# Altium PCB Mega2560ProMini-ServosExtendBoard.PcbDoc
Units mil, origin at the board's own origin, x right, y up, seen from the top; angles counter-clockwise.
Board outline 1720.03 x 2700.03 mil, 2 copper layers (Top Layer, Bottom Layer); 25 components, 20 nets, 151 pads, 0 vias.
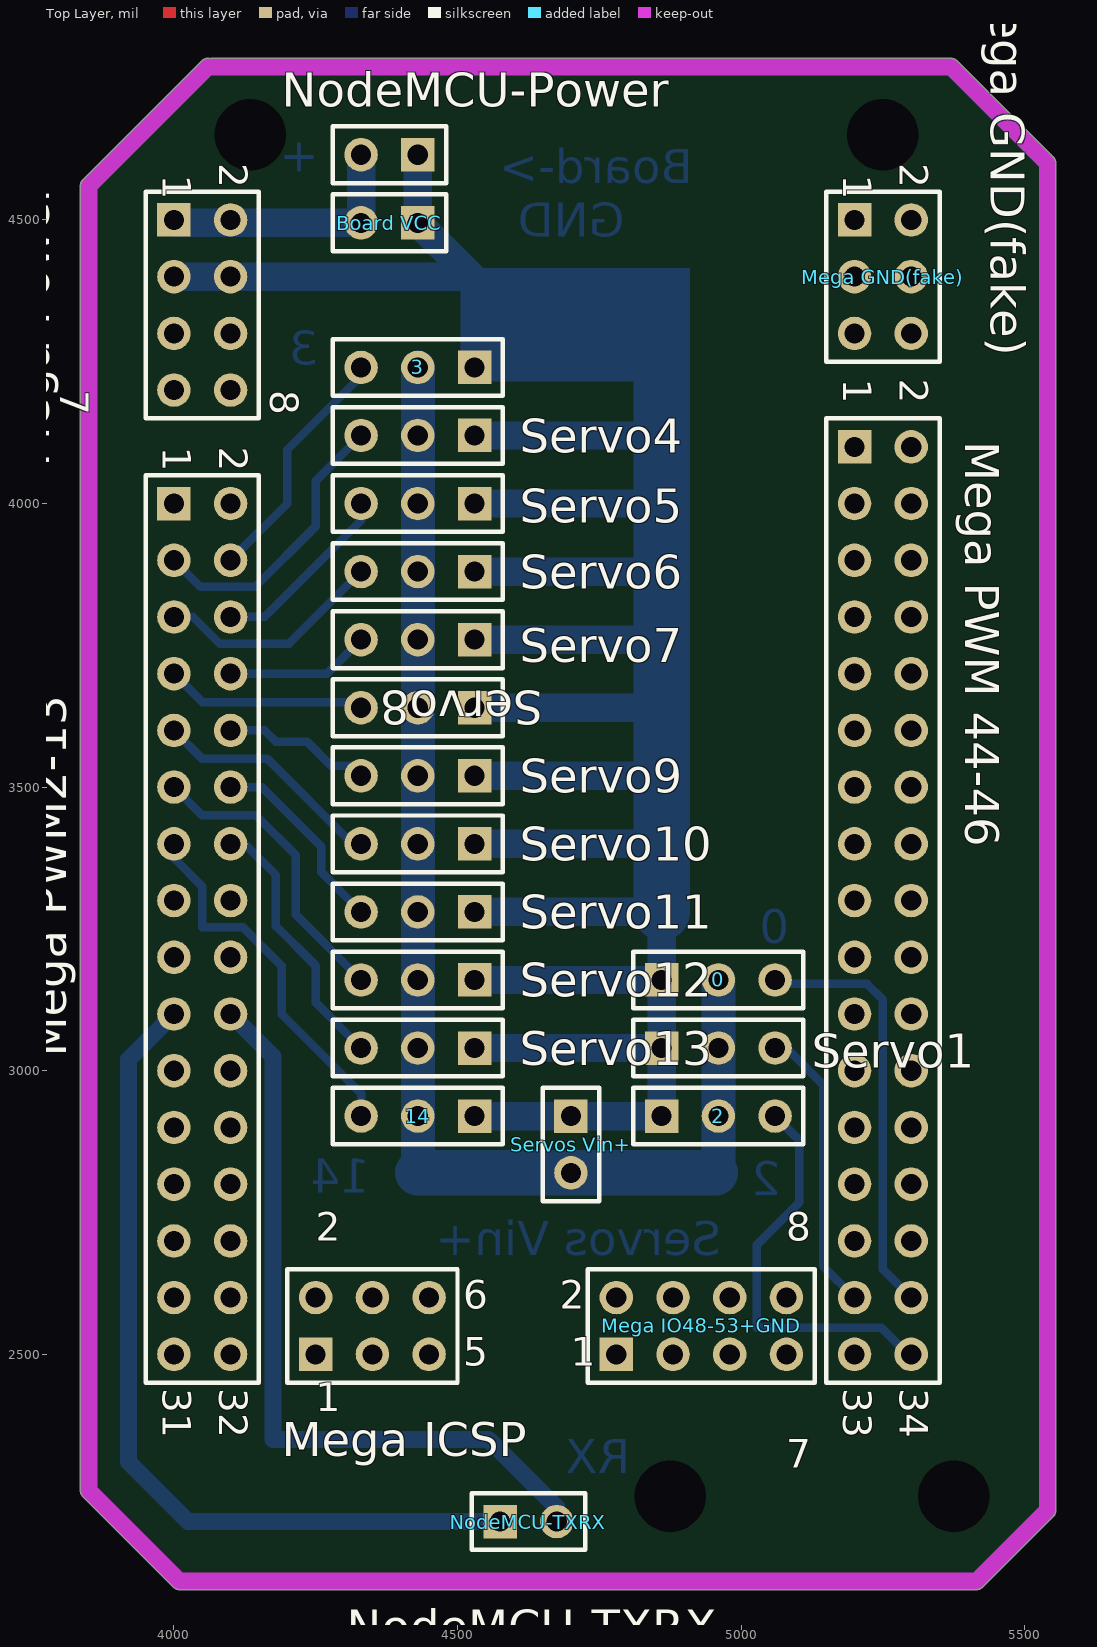
[diagram p0: Top Layer view]
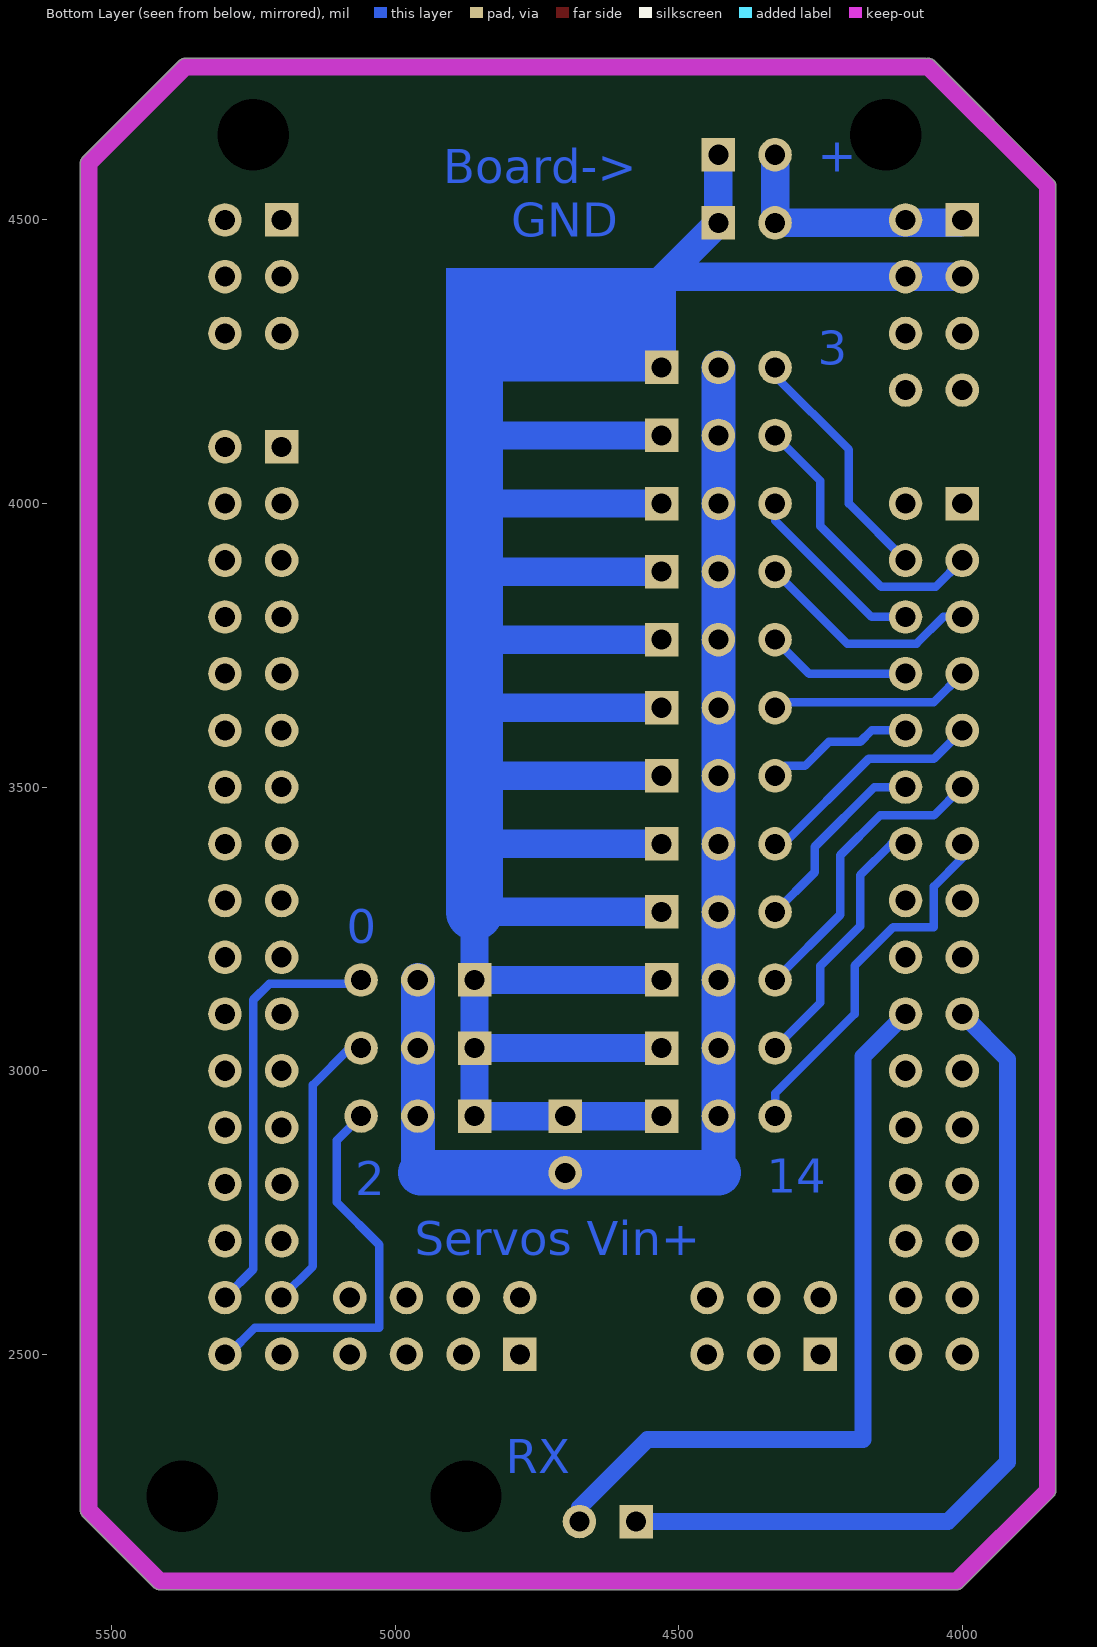
[diagram p1: Bottom Layer view, seen from below]

## Layer stack, top to bottom
Top Layer: signal copper 1.4
Dielectric: dielectric 12.6, FR-4, Dk 4.8
Bottom Layer: signal copper 1.4

## Board outline
3839.38,2249.38 3999.38,2089.38 3999.37,2089.4 ccw(c4010,2100) 4010,2084.99 5415,2084.99 ccw(c5415,2100) 5425.63,2089.4 5425.62,2089.38 5550.62,2214.38 5550.6,2214.37 ccw(c5540,2225) 5555.02,2225 5555.02,4600 ccw(c5540,4600) 5550.6,4610.63 5550.62,4610.62 5380.62,4780.62 5380.63,4780.6 ccw(c5370,4770) 5370,4785.02 4067.5,4785.02 ccw(c4067.5,4770) 4063.75,4784.54 ccw(c4060,4770) 4049.38,4780.62 3839.38,4570.62 3839.4,4570.63 ccw(c3850,4560) 3834.99,4560 3834.99,2260 ccw(c3850,2260)

## Design rules (kind name [scope] priority, off if disabled: settings)
Clearance [All] p1: gap=10
PolygonConnect [All] p1: connectstyle=Relief reliefconductorwidth=10 reliefentries=4 polygonreliefangle="90 Angle" airgapwidth=10
RoutingLayers [All] p1: top layer_v5=FALSE bottom layer_v5=TRUE
RoutingVias [All] p1: holewidth=28 width=50 viastyle="Through Hole" minholewidth=28 minwidth=50 maxholewidth=28 maxwidth=50
SolderMaskExpansion [All] p1: expansion=4
Width [All] p1: maxlimit=200 minlimit=15 preferedwidth=50
27 further rules are at their usual default settings.

## Components (designator, comment, footprint, x,y, rotation, side; value= is the part's Value field where it differs from the comment)
0 "Pin44" HDR1X3 4860,3160 r0 top (schematic designator Servo0)
2 "Pin46" HDR1X3 4860,2920 r0 top (schematic designator Servo2)
3 "Pin2" HDR1X3 4530,4240 r180 top (schematic designator Servo3)
14 "Pin13" HDR1X3 4530,2920 r180 top (schematic designator Servo14)
"Board VCC" "Header 2" HDR1X2 4430,4495 r180 top
"Mega GND(fake)" "Header 3X2" HDR2X3 5200,4500 r270 top
"Mega ICSP" "Header 3X2" HDR2X3 4250,2500 r0 top
"Mega IO48-53+GND" "Header 4X2" HDR2X4 4780,2500 r0 top
"Mega Power" "Header 4X2" HDR2X4 4000,4500 r270 top
"Mega PWM2-13" "Header 16X2" HDR2X16 4000,4000 r270 top
"Mega PWM 44-46" "Header 17X2" HDR2X17 5200,4100 r270 top
NodeMCU-Power "Header 2" HDR1X2 4430,4615 r180 top
NodeMCU-TXRX "Header 2" HDR1X2 4575,2205 r0 top
Servo1 "Pin45" HDR1X3 4860,3040 r0 top
Servo4 "Pin3" HDR1X3 4530,4120 r180 top
Servo5 "Pin4" HDR1X3 4530,4000 r180 top
Servo6 "Pin5" HDR1X3 4530,3880 r180 top
Servo7 "Pin6" HDR1X3 4530,3760 r180 top
Servo8 "Pin7" HDR1X3 4530,3640 r180 top
Servo9 "Pin8" HDR1X3 4530,3520 r180 top
Servo10 "Pin9" HDR1X3 4530,3400 r180 top
Servo11 "Pin10" HDR1X3 4530,3280 r180 top
Servo12 "Pin11" HDR1X3 4530,3160 r180 top
Servo13 "Pin12" HDR1X3 4530,3040 r180 top
"Servos Vin+" "Header 2" HDR1X2 4700,2920 r270 top (schematic designator "Servos Power In(Vin)")

## Footprints (in the part's own frame and the unit in brackets; to place one, negate y for a bottom-side part, rotate by r counter-clockwise, add the part's x,y. Pads: shape width x height; smd on the part's side, far side on the other; paste and mask are expansions set on the pad)
HDR1X2 [mm] "Connector; Header; 2 Position"
  rect 1.5x1.5 hole 0.9: 1(0,0)
  round 1.5 hole 0.9: 2(2.54,0)
  silkscreen extent -1.27,-1.27 3.81,1.27
HDR1X3 [mm] "Connector; Header; 3 Position"
  rect 1.5x1.5 hole 0.9: 1(0,0)
  round 1.5 hole 0.9: 2(2.54,0) 3(5.08,0)
  silkscreen extent -1.27,-1.27 6.35,1.27
HDR2X3 [mm] "Connector; Header; 3x2 Position"
  rect 1.5x1.5 hole 0.9: 1(0,0)
  round 1.5 hole 0.9: 2(0,2.54) 3(2.54,0) 4(2.54,2.54) 5(5.08,0) 6(5.08,2.54)
  silkscreen extent -1.27,-1.27 6.35,3.81
HDR2X4 [mm] "Connector; Header; 4x2 Position"
  rect 1.5x1.5 hole 0.9: 1(0,0)
  round 1.5 hole 0.9: 2(0,2.54) 3(2.54,0) 4(2.54,2.54) 5(5.08,0) 6(5.08,2.54) 7(7.62,0) 8(7.62,2.54)
  silkscreen extent -1.27,-1.27 8.89,3.81
HDR2X16 [mm] "Connector; Header; 16x2 Position"
  rect 1.5x1.5 hole 0.9: 1(0,0)
  round 1.5 hole 0.9: 2(0,2.54) 3(2.54,0) 4(2.54,2.54) 5(5.08,0) 6(5.08,2.54) 7(7.62,0) 8(7.62,2.54) 9(10.16,0) 10(10.16,2.54) 11(12.7,0) 12(12.7,2.54) 13(15.24,0) 14(15.24,2.54) 15(17.78,0) 16(17.78,2.54) 17(20.32,0) 18(20.32,2.54) 19(22.86,0) 20(22.86,2.54) 21(25.4,0) 22(25.4,2.54) 23(27.94,0) 24(27.94,2.54) 25(30.48,0) 26(30.48,2.54) 27(33.02,0) 28(33.02,2.54) 29(35.56,0) 30(35.56,2.54) 31(38.1,0) 32(38.1,2.54)
  silkscreen extent -1.27,-1.27 39.37,3.81
HDR2X17 [mm] "Connector; Header; 17x2 Position"
  rect 1.5x1.5 hole 0.9: 1(0,0)
  round 1.5 hole 0.9: 2(0,2.54) 3(2.54,0) 4(2.54,2.54) 5(5.08,0) 6(5.08,2.54) 7(7.62,0) 8(7.62,2.54) 9(10.16,0) 10(10.16,2.54) 11(12.7,0) 12(12.7,2.54) 13(15.24,0) 14(15.24,2.54) 15(17.78,0) 16(17.78,2.54) 17(20.32,0) 18(20.32,2.54) 19(22.86,0) 20(22.86,2.54) 21(25.4,0) 22(25.4,2.54) 23(27.94,0) 24(27.94,2.54) 25(30.48,0) 26(30.48,2.54) 27(33.02,0) 28(33.02,2.54) 29(35.56,0) 30(35.56,2.54) 31(38.1,0) 32(38.1,2.54) 33(40.64,0) 34(40.64,2.54)
  silkscreen extent -1.27,-1.27 41.91,3.81

## Part data
0 2 3 14 Servo1 Servo4 Servo5 Servo6 Servo7 Servo8 Servo9 Servo10 Servo11 Servo12 Servo13: library part "Header 3", "Header, 3-Pin"
"Board VCC" NodeMCU-Power NodeMCU-TXRX "Servos Vin+": "Header, 2-Pin"
"Mega GND(fake)" "Mega ICSP": "Header, 3-Pin, Dual row"
"Mega IO48-53+GND" "Mega Power": "Header, 4-Pin, Dual row"
"Mega PWM2-13": "Header, 16-Pin, Dual row"
"Mega PWM 44-46": "Header, 17-Pin, Dual row"

## Free pads (board coordinates)
  round 62.99 hole 125.98: 0(4135,4650) 0(4875,2250) 0(5250,4650) 0(5375,2250)

## Nets (pads, with @x,y where several pads share a name; then routed paths per layer and width w, separated by ;. In a path a pad name is that pad's centre, name@x,y a point inside that pad or via, vN(x,y) a via of type N, cw(c..) or ccw(c..) an arc to the next point about the centre after c; other vN are vias at no path point)
GND: 0.1 2.1 3.1 14.1 "Board VCC.1" "Mega Power.3" "Mega Power.4" "Servos Vin+.1" NodeMCU-Power.1 Servo1.1 Servo4.1 Servo5.1 Servo6.1 Servo7.1 Servo8.1 Servo9.1 Servo10.1 Servo11.1 Servo12.1 Servo13.1 | length 6336.4
  Bottom Layer w50: 4000,4400 4100,4400 4525,4400 ; NodeMCU-Power.1 4430,4495 4525,4400 ; 14.1 4700,2920 2.1 Servo1.1 0.1 4860,3280 Servo11.1 ; Servo13.1 4830,3040 ; Servo12.1 0.1@4840,3160 ; Servo10.1 4850,3400 ; Servo9.1 4850,3520 ; Servo8.1 4850,3640 ; Servo7.1 4850,3760 ; Servo6.1 4855,3880 ; Servo5.1 4860,4000 ; Servo4.1 4860,4120 4860,4240 3.1 4530,4395 4525,4400
  Bottom Layer w100: 4860,3280 4860,4330
MEGARX1-ESPTX: "Mega PWM2-13.19" NodeMCU-TXRX.1 | length 1521.6
  Bottom Layer w30: 4000,3100 3920,3020 3920,2310 4025,2205 NodeMCU-TXRX.1
MEGATX1-ESPRX: "Mega PWM2-13.20" NodeMCU-TXRX.2 | length 1355.8
  Bottom Layer w30: 4100,3100 4175,3025 4175,2350 4555,2350 4675,2230 NodeMCU-TXRX.2
PWM2: 3.3 "Mega PWM2-13.4" | length 435.3
  Bottom Layer w15: 4100,3900 4200,4000 4200,4095 4330,4225 3.3
PWM3: "Mega PWM2-13.3" Servo4.3 | length 506.9
  Bottom Layer w15: 4000,3900 4047.03,3852.97 4142.97,3852.97 4250,3960 4250,4040 Servo4.3
PWM4: "Mega PWM2-13.6" Servo5.3 | length 330.4
  Bottom Layer w15: 4100,3800 4160,3800 4330,3970 Servo5.3
PWM5: "Mega PWM2-13.5" Servo6.3 | length 402.1
  Bottom Layer w15: 4000,3800 4033.49,3800 4080.52,3752.97 4202.97,3752.97 Servo6.3
PWM6: "Mega PWM2-13.8" Servo7.3 | length 254.9
  Bottom Layer w15: 4100,3700 4270,3700 Servo7.3
PWM7: "Mega PWM2-13.7" Servo8.3 | length 354.9
  Bottom Layer w15: 4000,3700 4050,3650 4320,3650 Servo8.3
PWM8: "Mega PWM2-13.10" Servo9.3 | length 263.1
  Bottom Layer w15: 4100,3600 4160,3600 4180,3580 4235,3580 4277.5,3537.5 4312.5,3537.5 Servo9.3
PWM9: "Mega PWM2-13.9" Servo10.3 | length 412.8
  Bottom Layer w15: 4000,3600 4050,3550 4165,3550 4315,3400 Servo10.3
PWM10: "Mega PWM2-13.12" Servo11.3 | length 347.5
  Bottom Layer w15: 4100,3500 4155,3500 4260,3395 4260,3350 Servo11.3
PWM11: "Mega PWM2-13.11" Servo12.3 | length 532.3
  Bottom Layer w15: 4000,3500 4050,3450 4145,3450 4215,3380 4215,3275 Servo12.3
PWM12: "Mega PWM2-13.14" Servo13.3 | length 469.9
  Bottom Layer w15: 4100,3400 4125,3400 4180,3345 4180,3255 4250,3185 4250,3120 Servo13.3
PWM13: 14.3 "Mega PWM2-13.13" | length 658.9
  Bottom Layer w15: 4000,3400 4000,3375 4050,3325 4050,3252.97 4122.03,3252.97 4190,3185 4190,3100 4330,2960 14.3
PWM44: 0.3 "Mega PWM 44-46.32" | length 750.2
  Bottom Layer w15: 0.3 5067.03,3152.97 5222.03,3152.97 5250,3125 5250,2650 5300,2600
PWM45: "Mega PWM 44-46.31" Servo1.3 | length 509.7
  Bottom Layer w15: Servo1.3 5080,3040 5145,2975 5145,2655 5200,2600
PWM46: 2.3 "Mega PWM 44-46.34" | length 713
  Bottom Layer w15: 2.3 5102.5,2877.5 5102.5,2767.75 5027.97,2693.22 5027.97,2547.03 5247.03,2547.03 5294.06,2500 5300,2500
VCC: "Board VCC.2" "Mega Power.1" "Mega Power.2" NodeMCU-Power.2 | length 452.1
  Bottom Layer w50: 4000,4500 4005,4495 4330,4495 NodeMCU-Power.2
VIN: 0.2 2.2 3.2 14.2 "Servos Vin+.2" Servo1.2 Servo4.2 Servo5.2 Servo6.2 Servo7.2 Servo8.2 Servo9.2 Servo10.2 Servo11.2 Servo12.2 Servo13.2 | length 2297.1
  Bottom Layer w50: 4700,2820 4705,2815
  Bottom Layer w60: 4430,2820 14.2 Servo13.2 Servo12.2 Servo11.2 Servo10.2 Servo9.2 Servo8.2 Servo7.2 Servo6.2 Servo5.2 Servo4.2 3.2 ; 4960,2815 2.2 Servo1.2 0.2
  Bottom Layer w80: 4430,2820 4700,2820 4955,2820
pads on no net: "Mega GND(fake).1" "Mega GND(fake).2" "Mega GND(fake).3" "Mega GND(fake).4" "Mega GND(fake).5" "Mega GND(fake).6" "Mega ICSP.1" "Mega ICSP.2" "Mega ICSP.3" "Mega ICSP.4" "Mega ICSP.5" "Mega ICSP.6" "Mega IO48-53+GND.1" "Mega IO48-53+GND.2" "Mega IO48-53+GND.3" "Mega IO48-53+GND.4" "Mega IO48-53+GND.5" "Mega IO48-53+GND.6" "Mega IO48-53+GND.7" "Mega IO48-53+GND.8" "Mega Power.5" "Mega Power.6" "Mega Power.7" "Mega Power.8" "Mega PWM2-13.1" "Mega PWM2-13.2" "Mega PWM2-13.15" "Mega PWM2-13.16" "Mega PWM2-13.17" "Mega PWM2-13.18" "Mega PWM2-13.21" "Mega PWM2-13.22" "Mega PWM2-13.23" "Mega PWM2-13.24" "Mega PWM2-13.25" "Mega PWM2-13.26" "Mega PWM2-13.27" "Mega PWM2-13.28" "Mega PWM2-13.29" "Mega PWM2-13.30" "Mega PWM2-13.31" "Mega PWM2-13.32" "Mega PWM 44-46.1" "Mega PWM 44-46.2" "Mega PWM 44-46.3" "Mega PWM 44-46.4" "Mega PWM 44-46.5" "Mega PWM 44-46.6" "Mega PWM 44-46.7" "Mega PWM 44-46.8" "Mega PWM 44-46.9" "Mega PWM 44-46.10" "Mega PWM 44-46.11" "Mega PWM 44-46.12" "Mega PWM 44-46.13" "Mega PWM 44-46.14" "Mega PWM 44-46.15" "Mega PWM 44-46.16" "Mega PWM 44-46.17" "Mega PWM 44-46.18" "Mega PWM 44-46.19" "Mega PWM 44-46.20" "Mega PWM 44-46.21" "Mega PWM 44-46.22" "Mega PWM 44-46.23" "Mega PWM 44-46.24" "Mega PWM 44-46.25" "Mega PWM 44-46.26" "Mega PWM 44-46.27" "Mega PWM 44-46.28" "Mega PWM 44-46.29" "Mega PWM 44-46.30" "Mega PWM 44-46.33"

## Keep-outs
Keep-Out Layer:
  lines w30: 3850,2260 3850,4560 4060,4770 4067.5,4770 5370,4770 5540,4600 5540,2225 5415,2100 4010,2100 3850,2260

## Other copper
Bottom Layer:
  rectangle net GND: 4510,4235 4910,4415
  text "+" at 4255,4585 h60
  text "Board->" at 4915,4565 h60
  text "GND" at 4795,4470 h60
  text "RX" at 4805,2290 h60

## Text inside footprints (layer, text, board x,y; h text height)
"Mega GND(fake)": Top Overlay "2" at 5280,4600 h50 r270; Top Overlay "1" at 5180,4580 h50 r270
"Mega ICSP": Top Overlay "6" at 4510,2580 h50; Top Overlay "5" at 4510,2480 h50; Top Overlay "2" at 4250,2700 h50; Top Overlay "1" at 4250,2400 h50
"Mega IO48-53+GND": Top Overlay "2" at 4680,2580 h50; Top Overlay "1" at 4700,2480 h50; Top Overlay "7" at 5080,2300 h50; Top Overlay "8" at 5080,2700 h50
"Mega Power": Top Overlay "2" at 4080,4600 h50 r270; Top Overlay "1" at 3980,4580 h50 r270; Top Overlay "7" at 3800,4200 h50 r270; Top Overlay "8" at 4170,4200 h50 r270
"Mega PWM2-13": Top Overlay "2" at 4080,4100 h50 r270; Top Overlay "1" at 3980,4100 h50 r270; Top Overlay "31" at 3980,2440 h50 r270; Top Overlay "32" at 4080,2440 h50 r270
"Mega PWM 44-46": Top Overlay "2" at 5280,4220 h50 r270; Top Overlay "1" at 5180,4220 h50 r270; Top Overlay "33" at 5180,2440 h50 r270; Top Overlay "34" at 5280,2440 h50 r270